# Altium PCB USB charger.PcbDoc
Units mm, origin at the board's own origin, x right, y up, seen from the top; angles counter-clockwise.
Board outline 24.13 x 33.02 mm, 2 copper layers (Top Layer, Bottom Layer); 28 components, 22 nets, 104 pads, 41 vias.
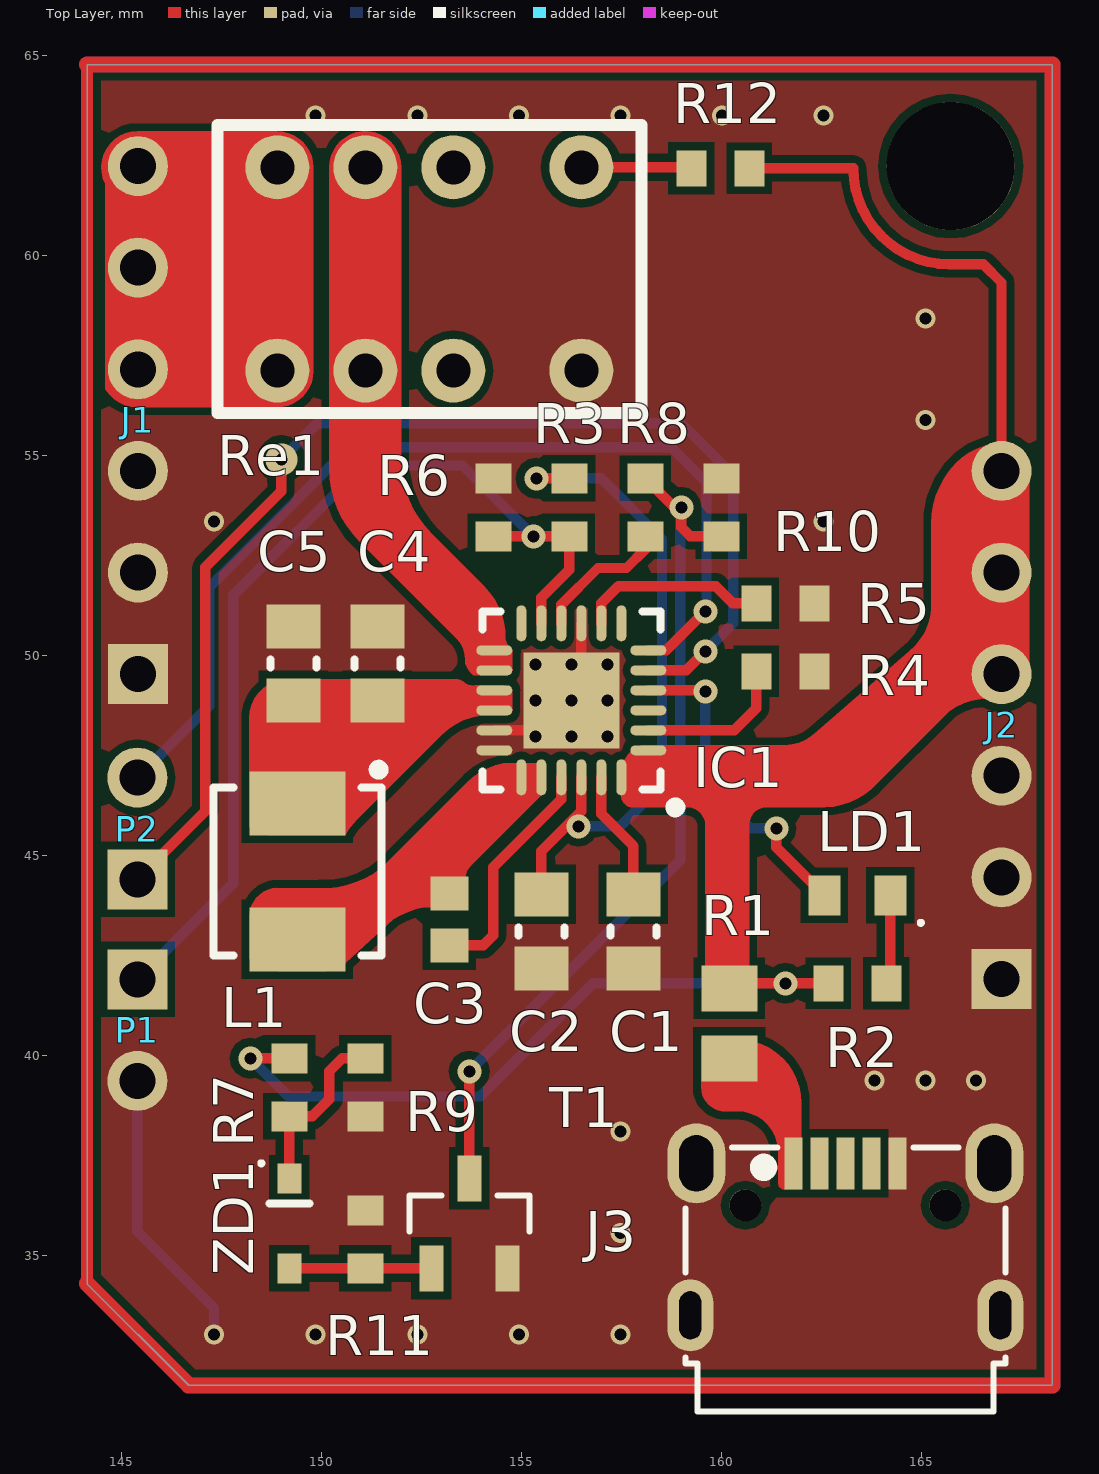
[diagram p0: Top Layer view]
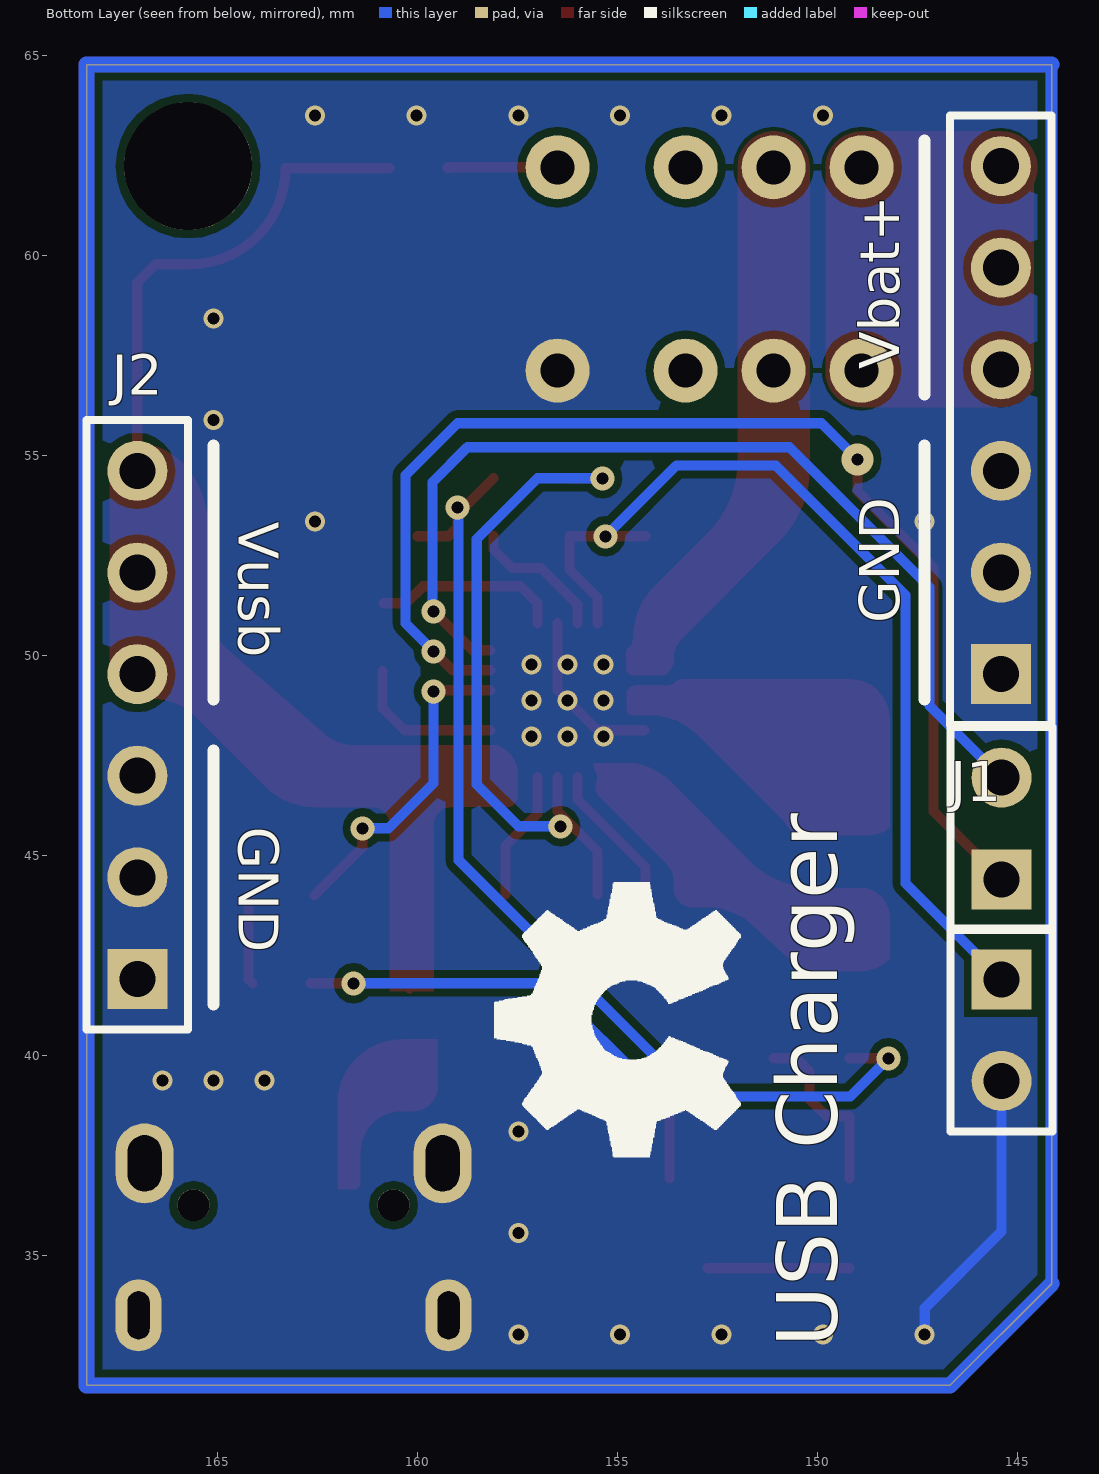
[diagram p1: Bottom Layer view, seen from below]
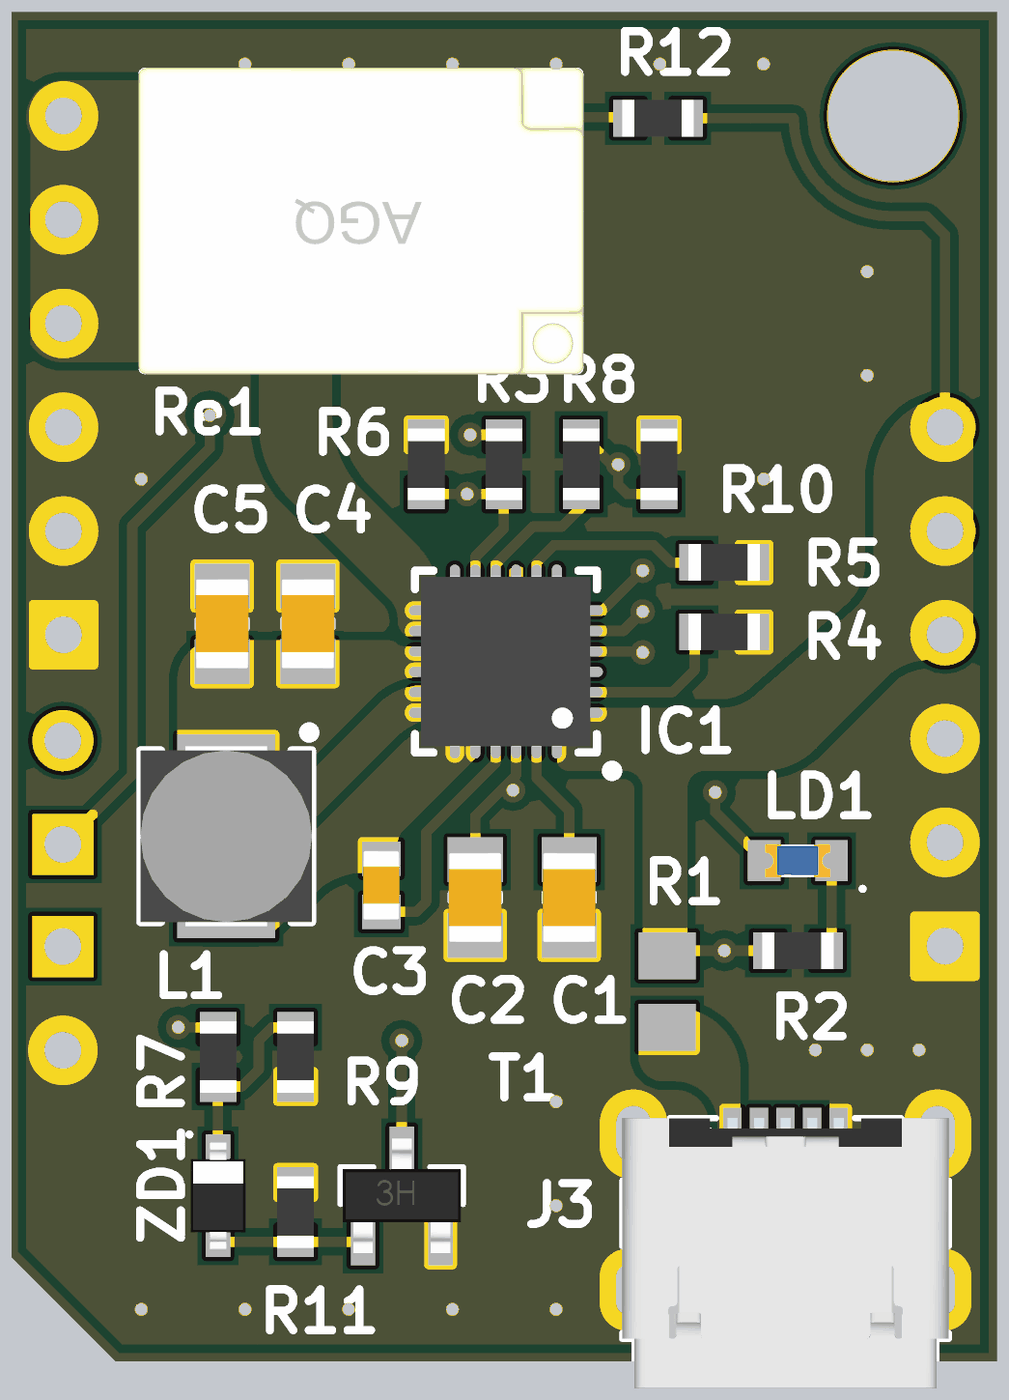
[diagram p2: 3D render of the assembled board from above, using the file's embedded part models]

## Layer stack, top to bottom
Top Solder: solder mask 0.0102, Solder Resist, Dk 3.5
Top Layer: signal copper 0.0356
Dielectric 1: dielectric 0.32, FR-4, Dk 4.8
Bottom Layer: signal copper 0.0356
Bottom Solder: solder mask 0.0102, Solder Resist, Dk 3.5

## Board outline
144.145,34.29 144.145,64.77 168.275,64.77 168.275,31.75 146.685,31.75

## Design rules (kind name [scope] priority, off if disabled: settings)
Clearance [All] p1: gap=0.2 ignorepadtopadclearanceinfootprint=FALSE
PlaneConnect [All] p1: planeconnectstyle=Direct reliefexpansion=0.508 reliefentries=4 reliefconductorwidth=0.254 reliefairgap=0.254
PolygonConnect [All] p1: connectstyle=Direct reliefconductorwidth=0.254 reliefentries=4 polygonreliefangle="90 Angle" airgapwidth=0.254
RoutingVias [All] p1: holewidth=0.3 width=0.6 viastyle="Through Hole" minholewidth=0.3 minwidth=0.5 maxholewidth=2.5 maxwidth=2
SolderMaskExpansion [All] p1: expansion=0.102
Width [All] p1: maxlimit=2 minlimit=0.2 preferedwidth=0.3
29 further rules are at their usual default settings.

## Components (designator, comment, footprint, x,y, rotation, side; value= is the part's Value field where it differs from the comment)
C1 "Capacitor" "0805 CAP" 157.8,43.1 r270 top value=10uF
C2 "Capacitor" "0805 CAP" 155.5,43.1 r90 top value=4.7uF
C3 "Capacitor" "0603 cap" 153.2,43.4 r270 top value=47nF
C4 "Capacitor" "0805 CAP" 151.4,49.8 r90 top value=10uF
C5 "Capacitor" "0805 CAP" 149.3,49.8 r90 top value=10uF
IC1 "BQ24296" QFN4x4 156.25,48.875 r180 top
J1 "Header 6" HDR1X6 145.415,49.53 r90 top
J2 "Header 6" HDR1X6 167.005,41.91 r90 top
J3 "Micro USB" 629105150521 163.1,34.4 r0 top
L1 "Inductor FDSD0420" FDSD0420-H 149.4,44.6 r270 top value=FDSD0420-H-1R5M=P3
LD1 "LED diode" LED_0603 163.4,44 r180 top value=Red
P1 "Header 2" HDR1X2 145.4,41.9 r270 top
P2 "Header 2" HDR1X2 145.4,44.4 r90 top
R1 "Resistor generic" "0805 RES" 160.2,40.8 r90 top value=0R
R2 "Resistor generic" "0603 RES" 163.4,41.8 r180 top value=470R
R3 "Resistor generic" "0603 RES" 156.2,53.7 r270 top value=5k6
R4 "Resistor generic" "0603 RES" 161.6,49.6 r180 top value=NP
R5 "Resistor generic" "0603 RES" 161.6,51.3 r180 top value=0R
R6 "Resistor generic" "0603 RES" 154.3,53.7 r270 top value=33k
R7 "Resistor generic" "0603 RES" 149.2,39.2 r270 top value=3k9
R8 "Resistor generic" "0603 RES" 158.1,53.7 r270 top value=220R
R9 "Resistor generic" "0603 RES" 151.1,39.2 r270 top value=10k
R10 "Resistor generic" "0603 RES" 160,53.7 r270 top value=470R
R11 "Resistor generic" "0603 RES" 151.1,35.4 r270 top value=10k
R12 "Resistor generic" "0603 RES" 159.975,62.175 r0 top value=27R
Re1 "Relay dual" "Relay AGQ2004H" 152.7,59.66 r180 top value=AGQ2004H
T1 "MMBT3904" BC857 153.7,35.8 r90 top
ZD1 "Diode Zener" SOD323 149.2,35.8 r90 top value=3V

## Footprints (in the part's own frame and the unit in brackets; to place one, negate y for a bottom-side part, rotate by r counter-clockwise, add the part's x,y. Pads: shape width x height; smd on the part's side, far side on the other; paste and mask are expansions set on the pad)
"0603 cap" [mm]
  rect 0.85x0.95 smd: 1(-0.65,0) 2(0.65,0)
  body extent -0.85,-0.45 0.85,0.45, height 0.8
"0603 RES" [mm] "RES0603 medium"
  rect 0.75x0.9 smd: 1(-0.725,0) 2(0.725,0)
  body extent -0.87,-0.45 0.87,0.45, height 0.4
"0805 CAP" [mm] "0805 cap"
  rect 1.1x1.35 smd: 1(-0.925,0) 2(0.925,0)
  silkscreen extent -0.1,-0.58 0.1,0.58, body extent -1.1,-0.65 1.1,0.65, height 0.8
"0805 RES" [mm] "RES0805 med"
  rect 1.15x1.4 smd: 1(-0.875,0) 2(0.875,0)
  body extent -1.1,-0.7 1.1,0.7, height 0.5
629105150521 [mm] "Micro USB 2.0 SMT Type B Horizontal 5 Contacts High Current"
  rect 0.45x1.3 smd: 1(-1.3,2.9) 2(-0.65,2.9) 3(0,2.9) 4(0.65,2.9) 5(1.3,2.9)
  oval 1.15x1.8 hole 0.55 slot 1.2 at 90 deg: Shell(-3.875,-0.9) Shell(3.875,-0.9)
  oval 1.45x2 hole 0.85 slot 1.4 at 90 deg: Shell(-3.725,2.9) Shell(3.725,2.9)
  round 0.8 hole 0.8 unplated: ""(-2.5,1.85) ""(2.5,1.85)
  silkscreen extent -4,-3.3 4,3.3, body extent -4,-3.3 4,3.3, height 2.71
BC857 [mm]
  rect 1.15x0.6 smd: 1(1.125,0) 2(-1.125,-0.95) 3(-1.125,0.95)
  silkscreen extent -0.2,-1.5 0.7,1.5, body extent -1.4,-1.45 1.4,1.45, height 1.3
FDSD0420-H [mm] "Murata FDSD0420-H SMD Inductor"
  rect 1.6x2.4 smd: 1(-1.7,0) 2(1.7,0)
  silkscreen extent -2.66,-2.1 2.1,2.16, body extent -2.2,-2.1 2.2,2.1, height 2.1
HDR1X2 [mm] "Connector; Header; 2 Position"
  rect 1.5x1.5 hole 0.9: 1(0,0)
  round 1.5 hole 0.9: 2(2.54,0)
HDR1X6 [mm] "Connector; Header; 6 Position"
  rect 1.5x1.5 hole 0.9: 1(0,0)
  round 1.5 hole 0.9: 2(2.54,0) 3(5.08,0) 4(7.62,0) 5(10.16,0) 6(12.7,0)
LED_0603 [mm] "LED diode 0603"
  rect 0.8x1 smd: 1(-0.825,0) 2(0.825,0)
  silkscreen extent -1.64,0.64 -1.54,0.74, body extent -0.8,-0.4 0.8,0.4, height 0.6
QFN4x4 [mm] "QFN, 24-Leads, Body 4,00x4,00mm, Pitch 0,50mm, Thermal Pad 2,60x2,60mm, IPC Medium Density"
  oval 0.9x0.25 smd: 1(-1.925,1.25) 2(-1.925,0.75) 3(-1.925,0.25) 4(-1.925,-0.25) 5(-1.925,-0.75) 6(-1.925,-1.25) 13(1.925,-1.25) 14(1.925,-0.75) 15(1.925,-0.25) 16(1.925,0.25) 17(1.925,0.75) 18(1.925,1.25)
  oval 0.25x0.9 smd: 7(-1.25,-1.925) 8(-0.75,-1.925) 9(-0.25,-1.925) 10(0.25,-1.925) 11(0.75,-1.925) 12(1.25,-1.925) 19(1.25,1.925) 20(0.75,1.925) 21(0.25,1.925) 22(-0.25,1.925) 23(-0.75,1.925) 24(-1.25,1.925)
  rect 2.4x2.4 smd: 25(0,0)
  silkscreen extent -2.73,-2.22 2.22,2.8, body extent -2.08,-2.08 2.08,2.08, height 1
"Relay AGQ2004H" [mm] "Panasonic Relay AGQ2004H, 4.5V 2x2A"
  round 1.6 hole 0.85: 1(-3.8,2.54) 2(-3.8,-2.54) 3(1.6,2.54) 4(3.8,2.54) 5(-0.6,2.54) 6(1.6,-2.54) 7(3.8,-2.54) 8(-0.6,-2.54)
  silkscreen extent -5.3,-3.6 5.3,3.6, body extent -5.45,-3.75 5.45,3.75, height 5.6
SOD323 [mm] "SOD323, 2-Leads, Body 1,25x2,50mm, IPC Medium Density"
  rect 0.75x0.6 smd: 1(-1.125,0) 2(1.125,0)
  silkscreen extent 0.5,-0.5 1.55,0.75, body extent -1.3,-0.68 1.3,0.67, height 1.1

## Part data
C1 C2 C3 C4 C5: library part "Capacitor NP", Voltage=10V
IC1: "Battery charger", Supplier Part Number 1=296-39592-1-ND, Iout max="2 A", Supplier 1=Digikey, Uin="4,5-6 VDC", Uout="5 V"
J1 J2: "Header, 6-Pin", LatestRevisionDate=17-Jul-2002, LatestRevisionNote="Re-released for DXP Platform.", Publisher="Altium Limited"
J3: library part 629105150521, "Micro USB 2.0 SMT Type B Horizontal 5 Contacts High Current WR-COM", ComponentLink1Description=Manufacturer, ComponentLink1URL=http://www.we-online.de, ComponentLink2Description=Datasheet, ComponentLink2URL=http://katalog.we-online.de/em/datasheet/629105150521.pdf, Construction=SMT, Gender=Receptacle, Interface Type="Type B", Part Number=629105150521, Published Date="April 2017", Publisher="Wurth Elektronik", Sub-Family="Micro USB 2.0", Type=Horizontal
L1: library part Inductor, "Single coil", Supplier Part Number 1=2530091, Supplier 1=Farnell
LD1: "LED"
P1 P2: "Header, 2-Pin", LatestRevisionDate=17-Jul-2002, LatestRevisionNote="Re-released for DXP Platform.", Publisher="Altium Limited"
R1 R2 R3 R4 R5 R6 R7 R8 R9 R10 R11 R12: library part Resistor, "Resistor SMD"
Re1: "Farnell 3104813", Supplier Part Number 1=3104813, Supplier 1=Farnell
T1: library part TR-NPN-PS
ZD1: "Zener"

## Free pads (board coordinates)
  round 3.2 hole 3.2: 8(165.735,62.23)

## Via types
v1: diameter 0.5, hole 0.3, Top Layer to Bottom Layer, tented both sides, 29 vias
v2: diameter 0.6, hole 0.3, Top Layer to Bottom Layer, tented both sides, 11 vias
v3: diameter 0.8, hole 0.3, Top Layer to Bottom Layer, tented both sides, 1 vias

## Nets (pads, with @x,y where several pads share a name; then routed paths per layer and width w, separated by ;. In a path a pad name is that pad's centre, name@x,y a point inside that pad or via, vN(x,y) a via of type N, cw(c..) or ccw(c..) an arc to the next point about the centre after c; other vN are vias at no path point)
GND: C1.2 C2.1 C4.2 C5.2 IC1.9 IC1.17 IC1.18 IC1.25 J1.1 J1.2 J1.3 J2.1 J2.2 J2.3 J3.5 J3.Shell P1.2 R4.1 R5.1 R6.1 R9.2 R10.1 R11.1 Re1.1 T1.2 | length 11.4
  Top Layer w0.254: IC1.17 155.5,48.125 v1(156.25,48.875) 156.5,49.125 IC1.9
  Bottom Layer w0.254: P1.2 145.4,35.6 147.32,33.68 v1(147.32,33.02)
  other v1: 149.86,33.02 152.4,33.02 154.94,33.02 157.48,33.02 157.48,35.56 157.48,38.1 163.83,39.37 165.1,39.37 166.37,39.37 155.35,47.975 156.25,47.975 157.15,47.975 155.35,48.875 157.15,48.875 155.35,49.775 156.25,49.775 157.15,49.775 147.32,53.34 162.56,53.34 165.1,55.88 165.1,58.42 149.86,63.5 152.4,63.5 154.94,63.5 157.48,63.5 160.02,63.5 162.56,63.5
NetC1_1: C1.1 IC1.23 | length 3.3
  Top Layer w0.254: IC1.23 157,46.037 157.8,45.237 C1.1
NetC2_2: C2.2 IC1.22 R3.1 | length 16.6
  Top Layer w0.254: v2(155.375,54.425) R3.1 ; C2.2 155.5,45.1 156.5,46.1 IC1.22
  Bottom Layer w0.254: v2(155.375,54.425) 157,54.425 158.519,52.906 158.519,46.769 157.475,45.725 v2(156.425,45.725)
NetC3_1: C3.1 IC1.19 IC1.20 L1.2
NetC3_2: C3.2 IC1.21 | length 5.9
  Top Layer w0.254: C3.2 154.05,42.75 154.3,43 154.3,44.7 156,46.4 IC1.21
NetC4_1: C4.1 C5.1 IC1.15 IC1.16 L1.1
NetIC1_2: IC1.2 R4.2 | length 3.9
  Top Layer w0.254: IC1.2 160.325,48.125 160.875,48.675 R4.2
NetIC1_4: IC1.4 LD1.2 | length 8.5
  Top Layer w0.254: IC1.4 159.775,49.125 159.75,49.1 v2(159.6,49.1) ; v2(161.375,45.675) 161.375,45.2 LD1.2
  Bottom Layer w0.254: v2(159.6,49.1) 159.6,46.8 160.725,45.675 v2(161.375,45.675)
NetIC1_6: IC1.6 P2.2 | length 24.8
  Top Layer w0.254: IC1.6 158.625,50.125 v2(159.6,51.1)
  Bottom Layer w0.254: P2.2 147.2,48.74 147.2,51.7 150.7,55.2 158.754,55.2 159.627,54.327 159.627,51.127 v2(159.6,51.1)
NetIC1_8: IC1.8 R5.2 | length 4.7
  Top Layer w0.254: IC1.8 157,51.3 157.427,51.727 159.86,51.727 160.287,51.3 R5.2@160.85,51.3
NetIC1_10: IC1.10 R8.2 | length 3.5
  Top Layer w0.254: IC1.10 156,51.264 156.917,52.181 157.631,52.181 158.1,52.65 R8.2
NetIC1_11: IC1.11 P1.1 R3.2 R6.2 | length 24.5
  Top Layer w0.254: R6.2 v2(155.3,52.975) R3.2 156.2,52.138 155.5,51.438 IC1.11
  Bottom Layer w0.254: P1.1 147.8,44.3 147.8,51.5 151.046,54.746 153.529,54.746 v2(155.3,52.975)
NetIC1_13: IC1.13 IC1.14 Re1.3 Re1.6
NetJ3_1: J3.1 R1.1
NetLD1_1: LD1.1 R2.1 | length 2.2
  Top Layer w0.254: R2.1 164.225,41.9 LD1.1
NetR7_2: R7.2 R9.1 ZD1.2 | length 4.5
  Top Layer w0.254: ZD1.2 R7.2 149.775,38.475 150.2,38.9 150.2,39.6 150.525,39.925 R9.1
NetR8_1: R8.1 R10.2 T1.1 | length 21.8
  Top Layer w0.254: T1.1 v2(153.7,39.6) ; R8.1 158.825,53.7 v2(159,53.7) 159,53.2 159.225,52.975 R10.2
  Bottom Layer w0.254: v2(153.7,39.6) 158.973,44.873 158.973,53.673 v2(159,53.7)
NetR11_2: R11.2 T1.3 ZD1.1 | length 3.6
  Top Layer w0.254: ZD1.1 R11.2 T1.3
NetR12_1: R12.1 Re1.2 | length 2.8
  Top Layer w0.254: Re1.2 159.25,62.2 R12.1
scl: IC1.5 P2.1 | length 30.5
  Top Layer w0.254: P2.1 147.1,46.1 147.1,52.2 149,54.1 v3(149,54.9) ; IC1.5 159.125,49.625 v2(159.6,50.1)
  Bottom Layer w0.254: v3(149,54.9) 149.9,55.8 159,55.8 160.3,54.5 160.3,50.8 v2(159.6,50.1)
Vbat: J1.4 J1.5 J1.6 Re1.4 Re1.7
Vusb: IC1.1 IC1.24 J2.4 J2.5 J2.6 R1.2 R2.2 R7.1 R12.2 | length 31
  Top Layer w0.254: v2(148.225,39.925) R7.1 ; R1.2 160.325,41.8 v2(161.6,41.8) R2.2 ; R12.2 163.3,62.175 ccw(c165.7,62.175) 165.7,59.775 166.55,59.775 167.005,59.32 J2.6
  Bottom Layer w0.254: v2(148.225,39.925) 149.177,38.973 153.973,38.973 156.8,41.8 v2(161.6,41.8)
pads on no net: IC1.3 IC1.7 IC1.12 J3. J3.2 J3.3 J3.4 Re1.5 Re1.8

## Polygon pours and split planes (outlines as drawn)
GND on Top Layer "GND" (solid, remove dead copper, pour order 0): 144.145,34.29 144.145,64.77 168.275,64.77 168.275,31.75 146.685,31.75
GND on Bottom Layer "GND" (solid, remove dead copper, pour order 1): 144.145,34.29 144.145,64.77 168.275,64.77 168.275,31.75 146.685,31.75

## Other copper
Top Layer:
  region net NetC3_1: 155.3,47.3 155.6,47.3 155.6,47.2 155.5,47.1 155.5,46.5
  region net Vusb: 167.5,49.3 ccw(c167.018,49.782) 167.7,49.782 167.7,54.8 ccw(c167.46,54.801) 167.629,54.971 167.3,55.3 167,55.3 ccw(c167.032,53.674) 165.859,54.8 ccw(c167.424,53.291) 165.25,53.291 ccw(c167.341,53.29) 165.25,53.25 165.25,51.15 cw(c163.71,51.288) 164.7,50.1 162.4,48.1 cw(c161.536,48.985) 161.603,47.75 ccw(c159.801,-1026.827) 158,47.75 ccw(c158.27,47.01) 157.5,47.175 157.5,46.441 ccw(c157.784,46.488) 157.774,46.2 159.1,46.2 cw(c159.148,45.779) 159.15,46.203 cw(c159.15,45.75) 159.603,45.75 cw(c159.183,45.748) 159.6,45.7 159.6,41.6 160.7,41.6 160.7,45.8 cw(c161.127,45.773) 161.1,46.2 162.6,46.2 ccw(c162.526,48.069) 163.9,46.8 165.7,48.6 cw(c166.662,47.303) 166.662,48.918 cw(c166.663,47.322) 166.9,48.9 ccw(c166.9,49.383) 167.241,49.041
  region net NetC3_1: 155.505,46.913 cw(c154.989,46.712) 155.5,46.5 153.812,44.812 ccw(c154.133,44.379) 153.6,44.3 153.6,44.183 cw(c153.117,44.183) 153.117,43.7 152.6,43.7 ccw(c152.875,41.751) 151.8,43.4 150.612,42.312 cw(c150.1,42.824) 150.1,42.1 148.924,42.1 cw(c148.924,43.124) 148.2,42.4 148.2,43.517 cw(c148.92,43.465) 149,44.183 149.918,44.183 ccw(c150.044,46.537) 151.072,44.415 ccw(c150.135,46.348) 151.654,44.83 153.65,46.825 cw(c154.866,45.609) 154.55,47.3 155.4,47.3 cw(c155.401,47.06) 155.571,47.229 155.6,47.2 155.51,46.974 ccw(c155.595,46.926) 155.5,46.95 ccw(c155.575,46.94)
  region net NetC4_1: 154.183,48.5 ccw(c154.189,46.836) 153.012,48.013 150.912,45.913 ccw(c152.251,44.574) 150.6,45.5 148.683,45.5 cw(c148.683,46.183) 148.2,45.7 148.2,48.434 cw(c149.166,48.434) 149.166,49.4 153.359,49.4 cw(c153.359,49.06) 153.6,49.3 ccw(c153.785,49.577) 153.85,49.25 154.524,49.25 cw(c154.524,48.965) 154.775,49.1 ccw(c160.895,48.863) 154.775,48.625 cw(c154.625,48.65) 154.6,48.5
  region net NetJ3_1: 160.4,38.6 cw(c160.4,37.573) 161.426,37.625 161.426,36.8 ccw(c161.575,36.8) 161.575,36.65 162,36.65 162,37.625 162,38.771 162,38.8 ccw(c160.4,38.8) 160.4,40.4 159.5,40.4 159.5,39.2 ccw(c160.1,39.2) 160.1,38.6
  region net NetIC1_13: 153.8,49.5 154.6,49.5 ccw(c154.616,49.662) 154.616,49.499 ccw(c154.616,49.662) 154.779,49.662 cw(c162.481,49.863) 154.777,49.863 cw(c162.461,49.863) 154.779,50.063 ccw(c154.651,50.091) 154.782,50.091 ccw(c154.65,50.091) 154.725,50.2 cw(c154.893,50.444) 154.634,50.301 cw(c155.315,50.536) 154.594,50.536 cw(c155.316,50.535) 154.6,50.625 ccw(c152.771,50.427) 154.064,51.736 152.751,53.049 cw(c154.566,54.863) 152,54.863 152,62.2 ccw(c151.1,62.2) 150.2,62.2 150.2,54.663 ccw(c152.765,54.663) 150.951,52.849 153.388,50.412 cw(c152.877,49.901) 153.6,49.901 153.6,49.8 ccw(c154.15,49.95)
  region net Vbat: 145.4,63.1 ccw(c145.4,62.2) 144.6,61.788 144.6,56.657 ccw(c145.4,57.129) 145.4,56.2 148.9,56.2 ccw(c148.9,57.1) 149.8,57.1 149.8,62.2 ccw(c148.9,62.2) 148.9,63.1
Multi-Layer:
  the board outline again, w0.4

## Silkscreen, mask and mechanical layers (free items; w line width, h text height)
Bottom Overlay:
  drawing of 5 lines, arcs and shapes, not listed
  text "Vbat+" at 147.955,57.15 h1 r270
  text "Vusb" at 164.465,53.34 h1 r90
  text "GND" at 147.955,50.8 h1 r270
  text "GND" at 164.465,45.72 h1 r90
  text "USB Charger" at 149.505,32.7 h1.52 r270

## Text inside footprints (layer, text, board x,y; h text height)
J3: Mechanical 15 "PCB Edge" at 161.2,32 h1